# Altium PCB radxa_cm3_io_board_v1360_pcb_layout.PcbDoc (part 6 of 7)
Units mil, origin at the board's own origin, x right, y up, seen from the top; angles counter-clockwise.
Board outline 6299.61 x 3544.09 mil, 4 copper layers (Top, GND, Power, Bottom), stack 35.4 mil thick; 513 components, 397 nets, 1855 pads, 2695 vias.
Unrouted connection lines stored in the file: 280.
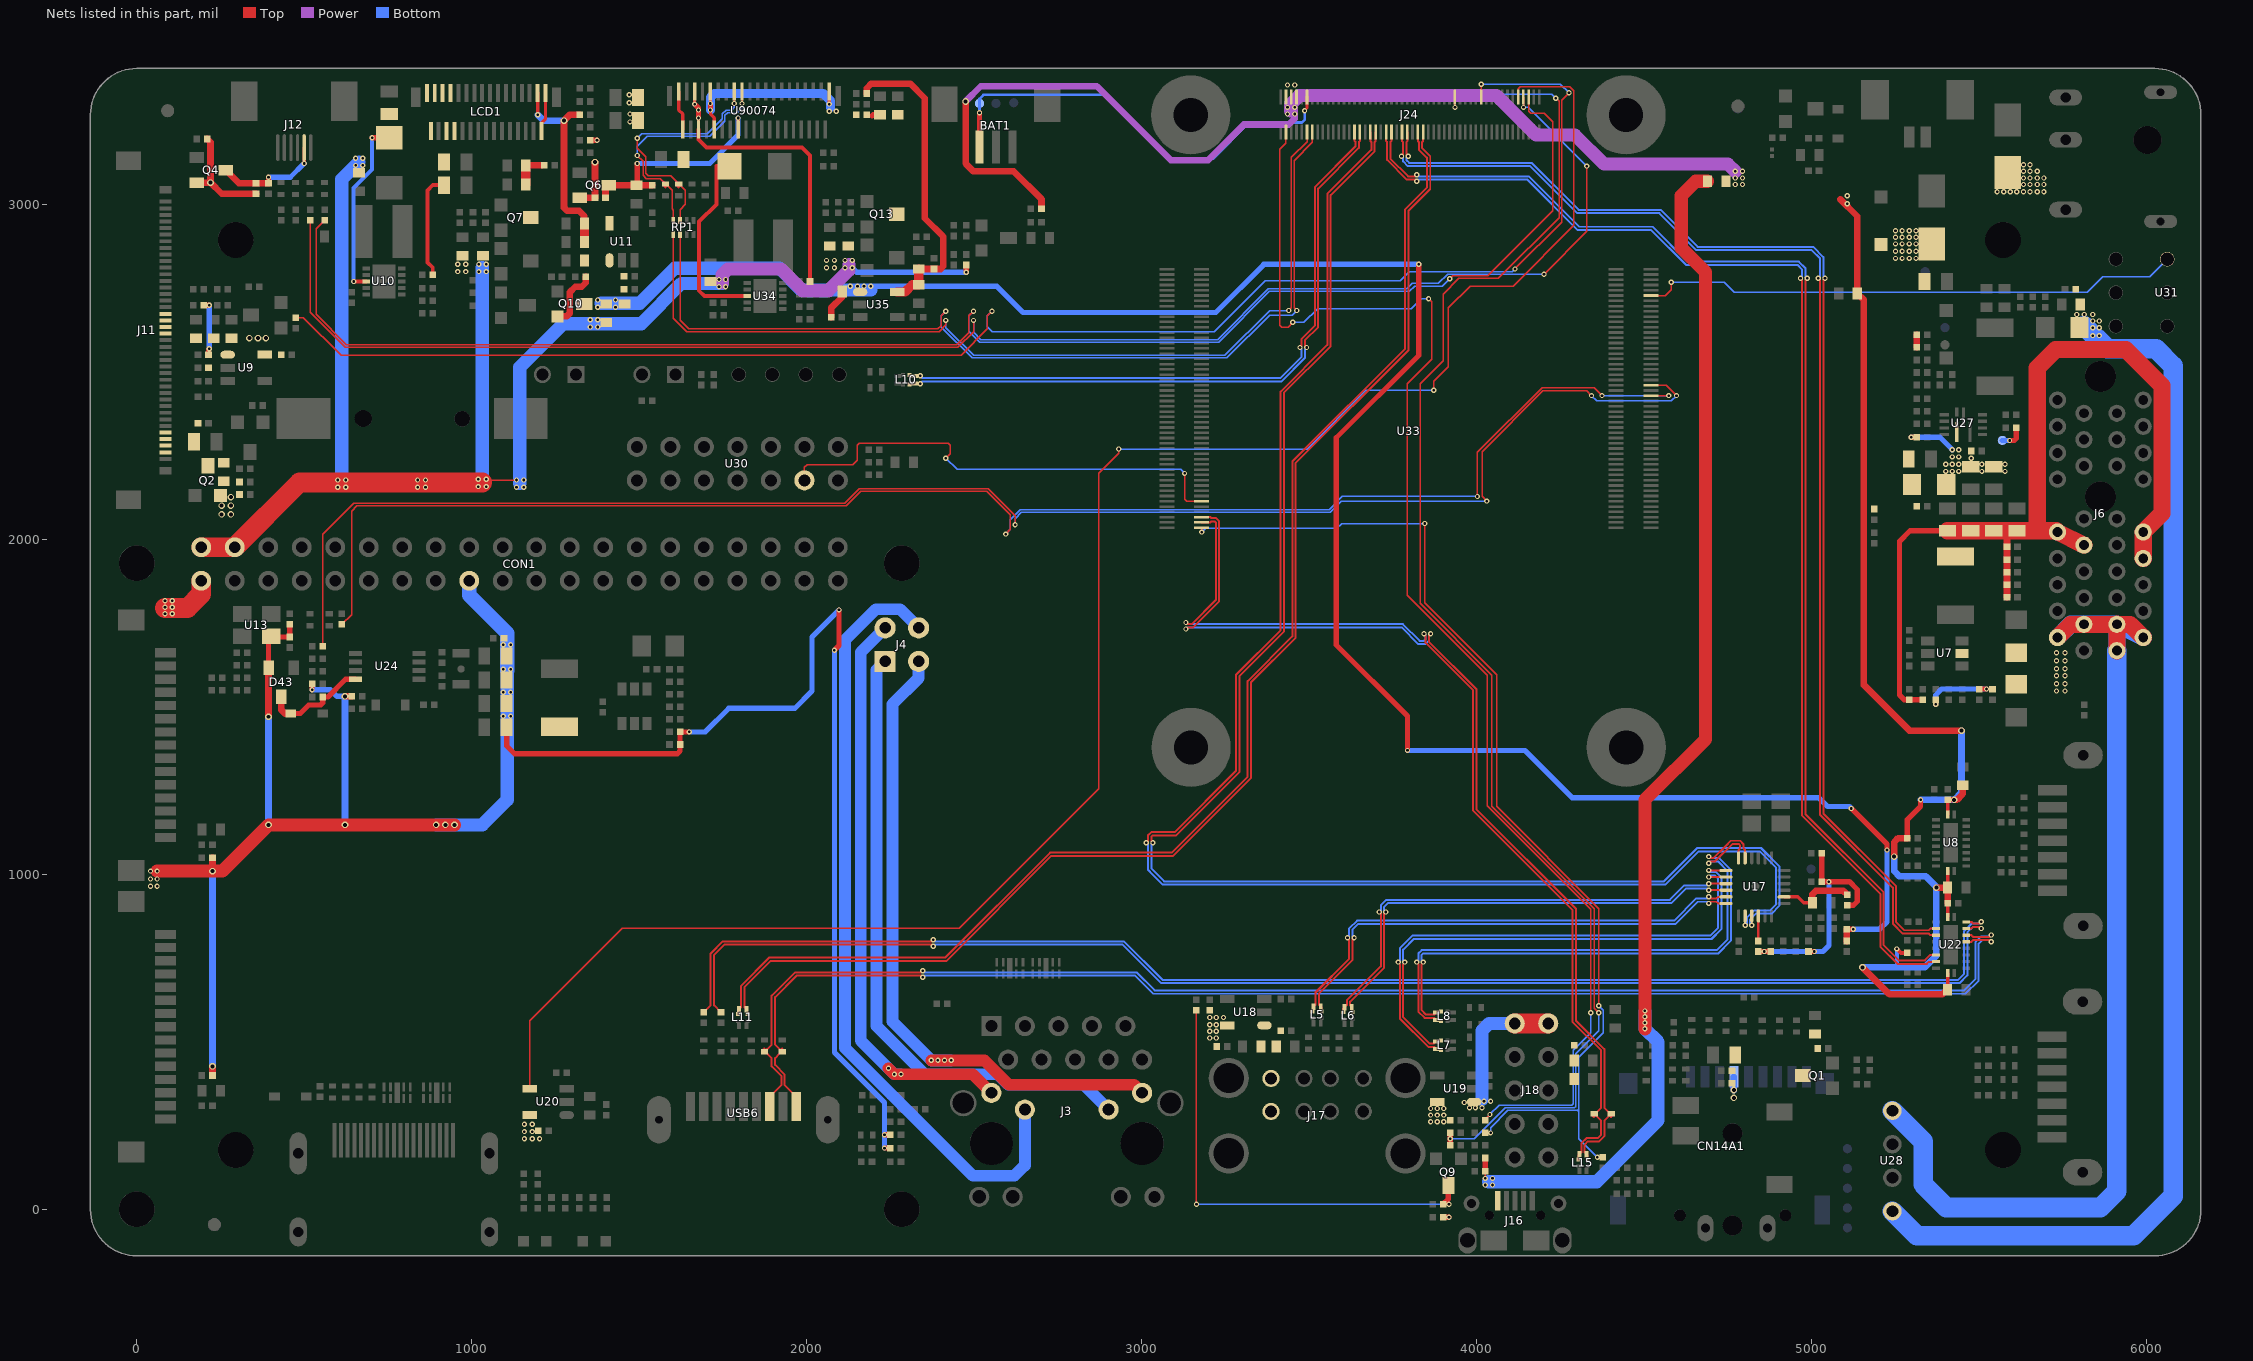
[diagram p8: the nets of this part, all layers, seen from the top]

## Via types
v1: diameter 15.75, hole 7.87, Top to Bottom, 2660 vias
v2: diameter 19.68, hole 11.81, Top to Bottom, 35 vias

## Nets (pads, with @x,y where several pads share a name; then routed paths per layer and width w, separated by ;. In a path a pad name is that pad's centre, name@x,y a point inside that pad or via, vN(x,y) a via of type N, cw(c..) or ccw(c..) an arc to the next point about the centre after c; other vN are vias at no path point) (continued)
TP_INT_1: J24.87 RP1.7 | length 2870.3
  Top w3.94: RP1.7@1621.89,2910.6 1621.89,2653.7 1647.64,2627.95 2391.79,2627.95 2401.57,2637.74 2401.57,2667.32 v1(2415.35,2681.1) ; v1(3462.6,2683.07) 3454.72,2690.94 3454.72,3130.51 3509.25,3185.04 J24.87@3509.25,3216.14
  Bottom w3.94: v1(2415.35,2681.1) 2401.57,2667.32 2401.57,2633.86 2494.09,2541.34 3253.94,2541.34 3381.89,2669.29 3448.82,2669.29 v1(3462.6,2683.07)
TP_INT_L: J24.8 R46.1 | length 4848.5
  Top w3.94: R46.1@517.72,2952.76 517.72,2677.17 622.05,2572.83 2450.9,2572.83 2498.03,2619.96 v1(2498.03,2653.54) ; J24.8@4139.17,3320.08 4139.76,3319.49 v1(4139.76,3289.37) ; v1(4200.79,2791.34) 4328.74,2919.29 v1(4328.74,3114.17)
  Bottom w3.94: v1(2498.03,2653.54) 2498.03,2617.94 2519.51,2596.46 3226.55,2596.46 3378.13,2748.03 3791.34,2748.03 3807.09,2763.78 3885.83,2763.78 3913.39,2791.34 v1(4200.79,2791.34) ; v1(4139.76,3289.37) 4153.54,3289.37 v1(4328.74,3114.17)
TP_INT_LCD: D15.1 RP1.2 U90074.25 | length 733.6
  Top w3.94: v1(1494.09,3196.85) 1494.09,3167.32 1519.69,3141.73 1519.69,3092.52 1527.56,3084.65 1594.49,3084.65 D15.1@1618.11,3061.02 1637.8,3041.34 1637.8,3000 1622.05,2984.25 1622.05,2951.76 RP1.2@1621.89,2951.6 ; v1(1783.46,3301.18) U90074.25@1783.46,3336.61
  Bottom w3.94: v1(1494.09,3196.85) 1507.87,3210.63 1702.76,3210.63 1748.03,3255.91 1748.03,3269.68 1759.84,3281.5 1775.59,3281.5 1783.46,3289.37 v1(1783.46,3301.18)
TP_PWR_DET: J24.24 R51.2 | length 4816.4
  Top w3.94: R51.2@474.41,2661.42 498.03,2661.42 610.24,2549.21 2460.69,2549.21 2539.37,2627.89 2539.37,2667.32 v1(2553.15,2681.1) ; J24.24@4013.19,3320.08 4013.19,3357.68 v1(4013.78,3358.27) ; v1(4114.17,2807.09) 4253.94,2946.85 4253.94,3311.02 v1(4275.59,3332.68)
  Bottom w3.94: v1(2553.15,2681.1) 2539.37,2667.32 2539.37,2635.15 2554.44,2620.08 3216.77,2620.08 3368.34,2771.65 3771.65,2771.65 3799.21,2799.21 4106.3,2799.21 v1(4114.17,2807.09) ; v1(4013.78,3358.27) 4250,3358.27 v1(4275.59,3332.68)
TP_RST_1: J24.89 RP1.8 | length 2792.8
  Top w3.94: RP1.8@1601.89,2910.6 1601.89,2659.92 1641.73,2620.08 2395.05,2620.08 2415.35,2640.38 v1(2415.35,2653.54) ; v1(3438.98,2683.07) 3446.85,2690.94 3446.85,3140.35 3493.5,3187.01 J24.89@3493.5,3216.14
  Bottom w3.94: v1(2415.35,2653.54) 2415.35,2631.89 2498.03,2549.21 3248.03,2549.21 3381.89,2683.07 v1(3438.98,2683.07)
TP_RST_L: J24.6 R45.1 | length 4739.7
  Top w3.94: R45.1@561.02,2952.76 535.43,2927.17 535.43,2671.26 625.98,2580.71 2447.64,2580.71 2484.25,2617.32 2484.25,2667.32 v1(2498.03,2681.1) ; v1(3919.29,2777.56) 3929.13,2787.4 4033.41,2787.4 4226.38,2980.37 4226.38,3246.74 4201.46,3271.65 4161.42,3271.65 4154.92,3278.15 J24.6@4154.92,3320.08
  Bottom w3.94: v1(2498.03,2681.1) 2484.25,2667.32 2484.25,2620.58 2516.25,2588.58 3229.81,2588.58 3381.39,2740.16 3799.21,2740.16 3814.96,2755.91 3897.64,2755.91 v1(3919.29,2777.56)
TP_RST_LCD: D16.1 RP1.1 U90074.23 | length 710.8
  Top w3.94: v1(1494.09,3145.67) 1511.81,3127.95 1511.81,3086.61 1521.65,3076.77 1562.99,3076.77 D16.1@1578.74,3061.02 1598.43,3041.34 1598.43,2986.22 1602.36,2982.28 1602.36,2952.07 RP1.1@1601.89,2951.6 ; v1(1807.09,3301.18) U90074.23@1807.09,3336.61
  Bottom w3.94: v1(1494.09,3145.67) 1494.09,3173.23 1523.62,3202.76 1710.63,3202.76 1755.91,3248.03 1755.91,3265.75 1763.78,3273.62 1793.31,3273.62 1807.09,3287.4 v1(1807.09,3301.18)
TR0: J3.11 J4.2 | length 1761.1
  Top w35.43: v1(2244.09,421.26) v1(2261.81,403.54) 2495.67,403.54 J3.11@2551.18,348.03
  Bottom w35.43: J4.2@2234.25,1735.83 2161.42,1662.99 2161.42,503.94 v1(2244.09,421.26) v1(2261.81,403.54) v1(2281.5,403.54)
TR1: J3.12 J4.1 | length 2372.5
  Bottom w35.43: J4.1@2334.25,1735.83 2278.74,1791.34 2206.69,1791.34 2114.17,1698.82 2114.17,482.28 2496.06,100.39 2620.08,100.39 2651.18,131.5 J3.12@2651.18,298.03
TR2: J3.13 J4.4 | length 1894.9
  Bottom w35.43: J4.4@2234.25,1635.83 2208.66,1610.24 2208.66,547.24 2352.36,403.54 2570.28,403.54 2601.77,372.05 2827.17,372.05 J3.13@2901.18,298.03
TR3: J3.14 J4.3 | length 1999.8
  Top w35.43: v1(2372.05,444.88) v1(2391.73,444.88) v1(2411.42,444.88) v1(2431.1,444.88) 2530.49,444.88 2603.33,372.05 2977.17,372.05 J3.14@3001.18,348.03
  Bottom w35.43: J4.3@2334.25,1635.83 2334.25,1586.22 2255.91,1507.87 2255.91,561.02 v1(2372.05,444.88) v1(2411.42,444.88) v1(2431.1,444.88)
TS: BAT1.3 J24.90 P2.1 | length 1317.4
  Top w7.87: v1(3486.22,3279.53) 3486.22,3280.12 3493.5,3287.4 J24.90@3493.5,3320.08
  Top w15.75: BAT1.3@2515.75,3171.26 v1(2515.75,3273.62)
  Bottom w7.87: v1(2515.75,3273.62) P2.1@2515.75,3301.18 2515.75,3314.96 2527.56,3326.77 2891.73,3326.77 3082.68,3135.83 3212.6,3135.83 3320.87,3244.09 3478.35,3244.09 3486.22,3251.97 v1(3486.22,3279.53)
TV_OUT: U30.11 U33.111 | length 1439.9
  Top w3.94: U30.11@1993.31,2175.98 1993.31,2214.57 2001.18,2222.44 2137.8,2222.44 2151.57,2236.22 2151.57,2281.5 2157.48,2287.4 2421.94,2287.4 2429.13,2280.2 2429.13,2255.91 v1(2415.35,2242.13) ; v1(3127.95,2196.85) 3127.95,2120.08 3134.45,2113.58 U33.111@3179.13,2113.58
  Bottom w3.94: v1(2415.35,2242.13) 2448.82,2208.66 3116.14,2208.66 v1(3127.95,2196.85)
UART2_RX: R168.2 U33.51 | length 4750.7
  Top w3.94: R168.2@612.2,1746.06 641.73,1775.59 641.73,2084.65 657.48,2100.39 2117.38,2100.39 2160.68,2143.7 2538.14,2143.7 2608.27,2073.57 2608.27,2029.53 v1(2594.49,2015.75) ; v1(4001.97,2127.95) 4001.97,2259.84 4194.88,2452.76 4350.39,2452.76 v1(4374.02,2429.13) ; U33.51@4520.47,2428.54 4521.06,2429.13 v1(4572.83,2429.13)
  Bottom w3.94: v1(2594.49,2015.75) 2608.27,2029.53 2608.27,2059.11 2637.74,2088.58 3559.17,2088.58 3598.54,2127.95 v1(4001.97,2127.95) ; v1(4374.02,2429.13) v1(4572.83,2429.13)
UART2_TX: R167.2 U33.55 | length 4883.1
  Top w3.94: R167.2@555.12,1681.1 555.12,2015.75 647.64,2108.27 2114.12,2108.27 2157.42,2151.57 2541.4,2151.57 2622.05,2070.92 v1(2622.05,2043.31) ; v1(4029.53,2114.17) 4015.75,2127.95 4015.75,2261.81 4196.85,2442.91 4328.74,2442.91 v1(4342.52,2429.13) ; U33.55@4520.47,2460.04 4565.55,2460.04 v1(4596.46,2429.13)
  Bottom w3.94: v1(2622.05,2043.31) 2622.05,2061.76 2641,2080.71 3562.43,2080.71 3595.9,2114.17 v1(4029.53,2114.17) ; v1(4342.52,2429.13) 4358.27,2413.39 4580.71,2413.39 v1(4596.46,2429.13)
USB1_DM: L5.4 R111.1 U17.11 | length 1466.5
  Top w3.94: R111.1@3509.84,590.55 3509.84,604.33 3510.83,605.32 L5.4@3512.79,605.32
  Top w5.91: L5.4@3512.79,605.32 3518.7,611.23 3518.7,647.42 3619.09,747.82 3619.09,806.1 v1(3614.17,811.02) ; v1(4692.91,933.07) 4698.82,928.15 4715.55,928.15 4720.47,933.07 U17.11@4744.09,933.07
  Bottom w5.91: v1(3614.17,811.02) 3619.09,815.94 3619.09,838.58 3642.72,862.2 4589.5,862.2 4655.44,928.15 4687.99,928.15 v1(4692.91,933.07)
USB1_DP: L5.2 R109.1 U17.12 | length 1450.2
  Top w3.94: L5.2@3534.45,605.32 3536.41,605.32 3537.4,604.33 R109.1@3537.4,590.55
  Top w5.91: L5.2@3534.45,605.32 3528.54,611.23 3528.54,643.35 3628.94,743.74 3628.94,806.1 v1(3633.86,811.02) ; v1(4692.91,913.39) 4698.82,918.31 4715.55,918.31 4720.47,913.39 U17.12@4744.09,913.39
  Bottom w5.91: v1(3633.86,811.02) 3628.94,815.94 3628.94,834.51 3646.79,852.36 4593.57,852.36 4659.52,918.31 4687.99,918.31 v1(4692.91,913.39)
USB2.0_HUB_PWR: J24.34 R107.2 R108.1 | length 4327.8
  Top w3.94: J24.34@3934.45,3320.08 3934.45,3288.78 v1(3935.04,3289.37) ; v1(4236.22,3316.93) 4246.06,3307.09 4246.06,2960.63 4064.96,2779.53 3946.85,2779.53 3899.61,2732.28 3899.61,2533.46 3830.71,2464.57 3830.71,1809.06 4045.28,1594.49 4045.28,1202.76 4350.39,897.64 4350.39,600.39 v1(4364.17,586.61)
  Top w15.75: R107.2@3921.26,190.94 v1(3921.26,210.63) R108.1@3921.26,228.35
  Bottom w3.94: v1(3921.26,210.63) 3992.13,210.63 4084.65,303.15 4291.34,303.15 4295.28,307.09 4295.28,464.57 4364.17,533.46 v1(4364.17,586.61) ; v1(3935.04,3289.37) 3935.04,3318.9 3944.88,3328.74 4224.41,3328.74 v1(4236.22,3316.93)
USB2_DM: L6.4 R112.1 U17.9 | length 1427.3
  Top w3.94: R112.1@3600.39,588.58 3600.39,598.43 L6.4@3605.31,603.35
  Top w5.91: L6.4@3605.31,603.35 3612.2,610.24 3612.2,624.02 3713.58,725.39 3713.58,882.87 v1(3708.66,887.8) ; v1(4692.91,972.44) U17.9@4744.09,972.44
  Bottom w5.91: v1(3708.66,887.8) 3713.58,892.72 3713.58,907.48 3730.31,924.21 4576.7,924.21 4620.01,967.52 4687.99,967.52 v1(4692.91,972.44)
USB2_DP: L6.2 R110.1 U17.10 | length 1411.9
  Top w3.94: L6.2@3626.97,603.35 3626.97,590.55 3629.92,590.55 R110.1@3631.89,588.58
  Top w5.91: L6.2@3626.97,603.35 3622.05,608.27 3622.05,619.94 3723.43,721.32 3723.43,882.87 v1(3728.35,887.8) ; v1(4692.91,952.76) U17.10@4744.09,952.76
  Bottom w5.91: v1(3728.35,887.8) 3723.43,892.72 3723.43,903.4 3734.39,914.37 4580.78,914.37 4624.09,957.68 4687.99,957.68 v1(4692.91,952.76)
USB2_HOST2_DM: J24.65 U17.14 | length 4744.4
  Top w5.91: v1(3013.78,1094.49) 3018.7,1099.41 3018.7,1116.14 3028.54,1125.98 3098.43,1125.98 3281.5,1309.06 3281.5,1595.47 3414.37,1728.35 3414.37,2441.01 3554.13,2580.78 3554.13,3031.57 3685.43,3162.87 3685.43,3186.02 3682.48,3188.98 J24.65@3682.48,3216.14 ; v1(4801.18,848.43) U17.14@4801.18,875.98
  Bottom w5.91: v1(3013.78,1094.49) 3018.7,1089.57 3018.7,1013.71 3031.43,1000.98 3062.92,969.49 4563.06,969.49 4662.47,1068.9 4844.35,1068.9 4893.7,1019.55 4893.7,910.57 4875.84,892.72 4828.74,892.72 4806.1,870.08 4806.1,853.35 v1(4801.18,848.43)
USB2_HOST2_DP: J24.63 U17.15 | length 4744.4
  Top w5.91: v1(3033.46,1094.49) 3028.54,1099.41 3028.54,1112.06 3032.62,1116.14 3102.5,1116.14 3291.34,1304.98 3291.34,1591.4 3424.21,1724.27 3424.21,2436.94 3563.98,2576.7 3563.98,3027.49 3695.28,3158.79 3695.28,3186.02 3698.23,3188.98 J24.63@3698.23,3216.14 ; v1(4820.87,848.43) U17.15@4820.87,875.98
  Bottom w5.91: v1(3033.46,1094.49) 3028.54,1089.57 3028.54,1017.79 3067,979.33 4558.99,979.33 4658.39,1078.74 4848.43,1078.74 4903.54,1023.62 4903.54,906.5 4879.92,882.87 4832.82,882.87 4815.94,866 4815.94,853.35 v1(4820.87,848.43)
USB2_HOST3_DM: J24.71 L10.4 R126.1 | length 1945.1
  Top w5.91: R126.1@2307.09,2490.16 2320.87,2490.16 2321.85,2489.17 L10.4@2321.85,2487.21 2322.84,2488.19 v1(2338.58,2488.19) ; v1(3472.44,2572.83) 3477.36,2577.76 3477.36,2598.43 3516.73,2637.8 3516.73,3051.25 3638.19,3172.71 3638.19,3186.02 3635.24,3188.98 J24.71@3635.24,3216.14
  Bottom w5.91: v1(2338.58,2488.19) 2345.47,2481.3 3413.25,2481.3 3477.36,2545.42 3477.36,2567.91 v1(3472.44,2572.83)
USB2_HOST3_DP: J24.69 L10.2 R124.1 | length 1960.3
  Top w5.91: R124.1@2307.09,2462.6 2310.04,2465.55 L10.2@2321.85,2465.55 2337.6,2465.55 v1(2338.58,2464.57) ; v1(3492.13,2572.83) 3487.2,2577.76 3487.2,2594.35 3526.57,2633.72 3526.57,3047.17 3648.03,3168.63 3648.03,3186.02 3650.98,3188.98 J24.69@3650.98,3216.14
  Bottom w5.91: v1(2338.58,2464.57) 2345.47,2471.46 3417.32,2471.46 3487.2,2541.34 3487.2,2567.91 v1(3492.13,2572.83)
USB3_DM: L7.2 R116.1 U17.7 | length 1582.7
  Top w3.94: L7.2@3877.95,501.97 L7.2@3878.93,500.99 3881.88,503.94 R116.1@3893.7,503.94
  Top w5.91: v1(3785.43,738.19) 3780.51,733.27 3780.51,573.96 3859.39,495.08 3871.06,495.08 L7.2@3877.95,501.97 ; v1(4692.91,1011.81) U17.7@4744.09,1011.81
  Bottom w5.91: v1(3785.43,738.19) 3780.51,743.11 3780.51,775.45 3812.15,807.09 4700.79,807.09 4730.31,836.61 4730.31,991.14 4714.57,1006.89 4697.83,1006.89 v1(4692.91,1011.81)
USB3_DP: L7.4 R121.1 U17.8 | length 1582.5
  Top w3.94: L7.4@3878.93,479.33 3891.73,479.33 3893.7,477.36 R121.1@3893.7,476.38
  Top w5.91: v1(3765.75,738.19) 3770.67,733.27 3770.67,569.88 3855.31,485.24 3873.02,485.24 L7.4@3878.93,479.33 ; v1(4692.91,992.13) U17.8@4744.09,992.13
  Bottom w5.91: v1(3765.75,738.19) 3770.67,743.11 3770.67,779.53 3808.07,816.93 4696.71,816.93 4720.47,840.69 4720.47,987.06 4710.49,997.05 4697.83,997.05 v1(4692.91,992.13)
USB3_HOST1_DM: J24.47 L11.1 R128.2 | length 4016.4
  Top w3.94: R128.2@1795.28,582.68 1795.28,594.5 L11.1@1798.23,597.44
  Top w5.91: L11.1@1798.23,597.44 1804.13,603.35 1804.13,667.32 1888.78,751.97 2413.39,751.97 2726.38,1064.96 3089.43,1064.96 3315.94,1291.48 3315.94,1576.77 3449.8,1710.63 3449.8,2232.42 3786.42,2569.04 3786.42,2984.94 3851.38,3049.9 3851.38,3139.17 3827.17,3163.39 3827.17,3186.02 3824.21,3188.98 J24.47@3824.21,3216.14
USB3_HOST1_DP: J24.45 L11.3 R129.2 | length 4016.4
  Top w3.94: L11.3@1819.89,597.44 1822.83,594.5 R129.2@1822.83,582.68
  Top w5.91: L11.3@1819.89,597.44 1813.98,603.35 1813.98,663.25 1892.86,742.13 2417.46,742.13 2730.45,1055.12 3093.5,1055.12 3325.79,1287.4 3325.79,1572.69 3459.65,1706.55 3459.65,2228.35 3796.26,2564.96 3796.26,2980.86 3861.22,3045.82 3861.22,3143.25 3837.01,3167.46 3837.01,3186.02 3839.96,3188.98 J24.45@3839.96,3216.14
USB3_HOST1_SSRXN: J24.59 U22.7 | length 3775
  Top w5.91: J24.59@3729.72,3216.14 3729.72,3188.98 3732.68,3186.02 3732.68,3132.41 3791.27,3073.82 3815.94,3073.82 v1(3820.87,3068.9) ; v1(4966.54,2779.53) 4971.46,2774.61 4971.46,1175.2 5204.72,941.93 5204.72,784.45 5256.73,732.44 5342.52,732.44 5348.27,738.19 5368.9,738.19 U22.7@5370.47,739.76
  Bottom w5.91: v1(3820.87,3068.9) 3825.79,3073.82 4151.57,3073.82 4302.17,2923.23 4520.67,2923.23 4625,2818.9 4957.54,2818.9 4971.46,2804.98 4971.46,2784.45 v1(4966.54,2779.53)
USB3_HOST1_SSRXP: J24.57 U22.6 | length 3762.1
  Top w5.91: J24.57@3745.47,3216.14 3745.47,3188.98 3742.52,3186.02 3742.52,3136.49 3795.35,3083.66 3815.94,3083.66 v1(3820.87,3088.58) ; v1(4986.22,2779.53) 4981.3,2774.61 4981.3,1179.27 5214.57,946.01 5214.57,788.53 5260.05,743.05 5337.93,743.05 5354.33,759.45 U22.6@5370.47,759.45
  Bottom w5.91: v1(3820.87,3088.58) 3825.79,3083.66 4155.65,3083.66 4306.24,2933.07 4524.75,2933.07 4629.08,2828.74 4961.61,2828.74 4981.3,2809.06 4981.3,2784.45 v1(4986.22,2779.53)
USB3_HOST1_SSTXN: J24.53 U22.3 | length 3679.6
  Top w5.91: v1(3775.59,3143.7) 3780.22,3148.33 3780.22,3185.73 3776.97,3188.98 J24.53@3776.97,3216.14 ; v1(5019.69,2779.53) 5024.61,2774.61 5024.61,1177.71 5242.13,960.19 5242.13,853.35 5272.05,823.43 5349.41,823.43 5354.33,818.5 U22.3@5370.47,818.5
  Bottom w5.91: v1(3775.59,3143.7) 3780.51,3138.78 3780.51,3127.95 3794.29,3114.17 4159.45,3114.17 4300.2,2973.43 4545.21,2973.43 4655.44,2863.19 4999.93,2863.19 5024.61,2838.51 5024.61,2784.45 v1(5019.69,2779.53)
USB3_HOST1_SSTXP: J24.51 U22.2 | length 3663.3
  Top w5.91: J24.51@3792.72,3216.14 3792.72,3188.39 3790.06,3185.73 3790.06,3148.92 v1(3795.28,3143.7) ; v1(5039.37,2779.53) 5034.45,2774.61 5034.45,1181.79 5251.97,964.27 5251.97,857.42 5276.12,833.27 5349.41,833.27 5354.33,838.19 U22.2@5370.47,838.19
  Bottom w5.91: v1(3795.28,3143.7) 3790.35,3138.78 3790.35,3132.03 3798.37,3124.02 4163.53,3124.02 4304.27,2983.27 4549.28,2983.27 4659.52,2873.03 5004.01,2873.03 5034.45,2842.59 5034.45,2784.45 v1(5039.37,2779.53)
USB3_SSRXN: D35.2 U22.15 USB6.5 | length 4266.1
  Top w5.91: USB6.5@1968.5,307.09 1968.5,336.61 1934.06,371.06 1934.06,402.56 1905.51,431.1 1905.51,451.77 1918.43,464.69 D35.2@1927.17,470.47 1905.51,492.13 1905.51,633.72 1969.63,697.83 2341.54,697.83 v1(2346.46,692.91) ; U22.15@5461.02,798.82 5476.38,798.82 5481.3,803.74 5530.91,803.74 v1(5535.43,799.21)
  Bottom w5.91: v1(2346.46,692.91) 2351.38,697.83 2980.31,697.83 3034.45,643.7 5458.66,643.7 5498.03,683.07 5498.03,793.31 5508.86,804.13 5530.51,804.13 v1(5535.43,799.21)
USB3_SSRXP: D34.2 U22.16 USB6.6 | length 4282.7
  Top w5.91: USB6.6@1889.76,307.09 1889.76,336.61 1924.21,371.06 1924.21,398.48 1895.67,427.03 1895.67,451.77 1882.75,464.69 D34.2@1874.02,470.47 1895.67,492.13 1895.67,637.8 1965.55,707.68 2341.54,707.68 v1(2346.46,712.6) ; U22.16@5461.02,818.5 5476.38,818.5 5481.3,813.58 5530.12,813.58 v1(5535.43,818.9)
  Bottom w5.91: v1(2346.46,712.6) 2351.38,707.68 2984.39,707.68 3038.53,653.54 5454.58,653.54 5488.19,687.15 5488.19,797.38 5504.78,813.98 5530.51,813.98 v1(5535.43,818.9)
USB3_SSTXN: C106.1 U22.17 | length 4222.2
  Top w5.91: C106.1@1744.09,588.58 1723.43,609.25 1723.43,759.7 1754.08,790.35 2373.03,790.35 v1(2377.95,785.43) ; U22.17@5461.02,838.19 5476.38,838.19 5481.5,843.31 5501.18,843.31 v1(5505.91,838.58)
  Bottom w5.91: v1(2377.95,785.43) 2382.87,790.35 2942.77,790.35 3057.93,675.2 5440.94,675.2 5464.57,698.82 5464.57,826.63 5481.44,843.5 5500.98,843.5 v1(5505.91,838.58)
USB3_SSTXP: C107.1 U22.18 | length 4238.5
  Top w5.91: C107.1@1692.91,588.58 1713.58,609.25 1713.58,763.78 1750,800.2 2373.03,800.2 v1(2377.95,805.12) ; U22.18@5461.02,857.87 5476.77,857.87 5481.5,853.15 5500.79,853.15 v1(5505.91,858.27)
  Bottom w5.91: v1(2377.95,805.12) 2382.87,800.2 2946.85,800.2 3062.01,685.04 5436.87,685.04 5454.72,702.9 5454.72,830.71 5477.36,853.35 5500.98,853.35 v1(5505.91,858.27)
USB4_DM: L8.2 R117.1 U17.5 | length 1645.4
  Top w3.94: L8.2@3878.93,587.6 3881.88,590.55 R117.1@3893.7,590.55
  Top w5.91: v1(3840.55,738.19) 3835.63,733.27 3835.63,594.63 3848.57,581.69 3873.02,581.69 L8.2@3878.93,587.6 ; v1(4692.91,1053.15) 4697.83,1048.23 4706.62,1048.23 4743.11,1084.72 4758.79,1100.39 4786.42,1100.39 4796.26,1090.55 4796.26,1077.76 4801.18,1072.83 U17.5@4801.18,1049.21
  Bottom w5.91: v1(3840.55,738.19) 3835.63,743.11 3835.63,759.7 3839.71,763.78 4720.47,763.78 4758.86,802.17 4758.86,1013.78 4724.41,1048.23 4697.83,1048.23 v1(4692.91,1053.15)
USB4_DP: L8.4 R122.1 U17.6 | length 1629.1
  Top w3.94: L8.4@3878.93,565.94 3890.75,565.94 R122.1@3893.7,562.99
  Top w5.91: v1(3820.87,738.19) 3825.79,733.27 3825.79,590.55 3844.49,571.85 3873.02,571.85 L8.4@3878.93,565.94 ; v1(4692.91,1033.46) 4697.83,1038.39 4710.7,1038.39 4762.87,1090.55 4782.34,1090.55 4786.42,1086.47 4786.42,1077.76 4781.5,1072.83 U17.6@4781.5,1049.21
  Bottom w5.91: v1(3820.87,738.19) 3825.79,743.11 3825.79,763.78 3835.63,773.62 4716.4,773.62 4749.02,806.24 4749.02,1009.7 4720.33,1038.39 4697.83,1038.39 v1(4692.91,1033.46)
USB_5V_IN: J24.94 J24.96 J24.98 R185.2 R222.2 | length 3127.7
  Top w3.94: J24.98@3430.51,3320.08 J24.98@3431.1,3319.49
  Top w19.68: v2(2474.41,3307.09) 2474.41,3122.05 2498.03,3098.43 2618.11,3098.43 2700.79,3015.75 R222.2@2700.79,2986.22
  Power w3.94: v1(3435.04,3269.68) 3444.88,3279.53
  Power w19.68: v2(2474.41,3307.09) 2519.69,3352.36 2866.14,3352.36 3086.61,3131.89 3198.82,3131.89 3305.12,3238.19 3438.98,3238.19 3456.69,3255.91 v1(3456.69,3269.68) v1(3456.69,3289.37)
  Power w39.37: 3444.88,3279.53 3444.88,3299.21 3470.47,3324.8 4059.06,3324.8 4177.17,3206.69 4293.31,3206.69 4379.92,3120.08 4750,3120.08 v1(4771.65,3098.43)
  other v1: 4771.65,3059.06 4793.31,3059.06 4771.65,3078.74 4793.31,3078.74 4793.31,3098.43 3435.04,3289.37 3435.04,3356.3 3456.69,3356.3
USB_OTG0_DM: D19.2 L15.1 R92.2 U33.103 | length 3011.5
  Top w3.94: R92.2@4303.15,149.61 4303.15,161.42 4305.12,163.39 L15.1@4306.1,164.37
  Top w5.91: v1(3131.89,1751.97) 3136.81,1747.05 3149.54,1747.05 3221.46,1818.97 3221.46,2049.61 3217.52,2053.54 3207.68,2053.54 3204.72,2050.59 U33.103@3179.13,2050.59 ; v1(3842.52,1718.5) 3847.44,1713.58 3847.44,1690.94 3989.17,1549.21 3989.17,1190.59 4286.42,893.35 4286.42,559.06 4371.06,474.41 4371.06,303.15 4359.13,291.22 D19.2@4350.39,285.43 4371.06,264.76 4371.06,222.58 4361.08,212.6 4327.62,212.6 4312.01,196.99 4312.01,170.28 L15.1@4305.12,163.39
  Bottom w5.91: v1(3131.89,1751.97) 3136.81,1747.05 3779.67,1747.05 3829.86,1696.85 3842.38,1696.85 3847.44,1701.91 3847.44,1713.58 v1(3842.52,1718.5)
USB_OTG0_DP: D18.2 L15.3 R93.2 U33.105 | length 3059.6
  Top w3.94: L15.3@4327.76,164.37 4327.96,164.16 4330.71,161.42 R93.2@4330.71,149.61
  Top w5.91: v1(3131.89,1732.28) 3136.81,1737.2 3153.61,1737.2 3231.3,1814.89 3231.3,2054.13 3222.05,2063.39 3207.68,2063.39 3204.72,2066.34 U33.105@3179.13,2066.34 ; v1(3862.2,1718.5) 3857.28,1713.58 3857.28,1695.02 3999.02,1553.29 3999.02,1194.67 4296.26,897.42 4296.26,563.13 4380.91,478.49 4380.91,303.15 4392.84,291.22 D18.2@4401.57,285.43 4380.91,264.76 4380.91,218.5 4365.16,202.76 4331.69,202.76 4321.85,192.91 4321.85,170.28 L15.3@4327.96,164.16
  Bottom w5.91: v1(3131.89,1732.28) 3136.81,1737.2 3775.59,1737.2 3825.79,1687.01 3846.46,1687.01 3857.28,1697.83 3857.28,1713.58 v1(3862.2,1718.5)
USB_OTG0_ID: R95.2 R99.2 U33.101 | length 3198.2
  Top w3.94: v1(3179.13,2021.65) U33.101@3179.13,2034.84 ; v1(3844.49,2047.24) 3844.49,1811.02 4059.06,1596.46 4059.06,1202.76 4364.17,897.64 v1(4364.17,608.27) ; R99.2@4025.59,228.35 v1(4041.34,228.35) ; v1(4360.24,155.51) R95.2@4375.98,155.51
  Bottom w3.94: v1(3179.13,2021.65) 3190.94,2033.46 3582.68,2033.46 3596.46,2047.24 v1(3844.49,2047.24) ; v1(4041.34,228.35) 4041.34,244.09 4092.52,295.28 4301.18,295.28 ; v1(4360.24,155.51) 4305.12,210.63 4305.12,291.34 ; v1(4364.17,608.27) 4377.95,594.49 4377.95,527.56 4305.12,454.72 4305.12,299.21 ; 4301.18,295.28 4305.12,291.34 ; 4301.18,295.28 4305.12,295.28 ; 4301.18,295.28 4305.12,299.21 ; 4305.12,291.34 4305.12,295.28 ; 4305.12,295.28 4305.12,299.21
USB_OTG0_VBUSDET: J24.97 R98.2 | length 4037.7
  Top w3.94: J24.97@3430.51,3216.14 3430.51,3183.07 3411.42,3163.98 3411.42,2639.76 3417.32,2633.86 3437.01,2633.86 v1(3450.79,2647.64) ; v1(3856.3,2718.5) 3866.14,2708.66 3866.14,2537.4 3793.31,2464.57 3793.31,1832.68 4031.5,1594.49 4031.5,1204.72 4340.55,895.67 v1(4340.55,586.61) ; R98.2@4025.59,265.75 4025.59,268.87 4039.37,282.65 v1(4039.37,283.46)
  Bottom w3.94: v1(3450.79,2647.64) 3484.25,2647.64 3525.59,2688.98 3805.12,2688.98 3834.65,2718.5 v1(3856.3,2718.5) ; v1(4039.37,283.46) 4066.93,311.02 4283.46,311.02 4287.4,314.96 4287.4,474.41 4340.55,527.56 v1(4340.55,586.61)
USB_PWR_EN: Q9.3 R114.2 R120.2 | length 1412.4
  Top w3.94: v1(3163.39,15.75) R114.2@3163.39,594.49 ; R120.2@3899.61,15.75 v1(3917.32,15.75)
  Top w15.75: R120.2@3899.61,15.75 3915.35,31.5 Q9.3@3915.35,71.2
  Bottom w3.94: v1(3163.39,15.75) v1(3917.32,15.75)
USB_PWR_H: J24.10 U20.4 | length 5579.5
  Top w3.94: U20.4@1173.23,360.24 1173.23,562.79 1449.02,838.58 2454.72,838.58 2872.05,1255.91 2872.05,2197.74 2931.1,2256.79 v1(2931.1,2269.68) ; v1(3872.05,2444.88) 3872.05,2472.44 3915.35,2515.75 3915.35,2690.94 3980.31,2755.91 4108.33,2755.91 4289.37,2936.95 4289.37,3338.58 4277.56,3350.39 4129.33,3350.39 4123.43,3344.49 J24.10@4123.43,3320.08
  Bottom w3.94: v1(2931.1,2269.68) 3493.95,2269.68 3669.15,2444.88 v1(3872.05,2444.88)
VBUS: C86.1 J16.1 R100.2 R185.1 | length 3687.8
  Top w3.94: v1(4025.59,92.52) C86.1@4025.59,114.17 ; R100.2@4025.59,152.6 R100.2@4025.59,153.54
  Top w15.75: C86.1@4025.59,114.17 R100.2@4025.59,152.6
  Top w39.37: v1(4501.97,539.37) v1(4501.97,592.52) 4501.97,1222.44 4683.07,1403.54 4683.07,2797.24 4610.24,2870.08 4610.24,3025.59 4653.54,3068.9 R185.1@4688.98,3068.9
  Bottom w3.94: v1(4025.59,72.83) 4035.43,82.68
  Bottom w39.37: 4035.43,82.68 4358.27,82.68 4541.34,265.75 4541.34,500 v1(4501.97,539.37) v1(4501.97,592.52)
  other v1: 4047.24,72.83 4047.24,92.52 4501.97,557.09 4501.97,574.8
VCC3V3_LCD0: C40.1 C41.1 C42.1 C46.1 C47.1 J11.18 J11.19 J11.20 J11.21 R40.2 U9.1 | length 164.2
  Top w15.75: R40.2@200.79,2698.82 v1(216.54,2698.82) ; C42.1@214.57,2551.18 214.57,2566.93 v1(216.54,2568.9)
  Bottom w15.75: v1(216.54,2568.9) v1(216.54,2698.82)
VCC3V3_PCIE: C12.1 C13.1 C14.1 C20.1 C21.1 C22.1 J6.A9 J6.A10 J6.B8 J6.B10 L1.2 R15.1 R21.2 R22.2 R23.2 R24.1 | length 3008.9
  Top w15.75: R15.1@5330.71,1521.65 C12.1@5291.34,1521.65 5275.59,1521.65 5261.81,1535.43 5261.81,1954.72 5261.81,1994.09 5293.31,2025.59 C20.1@5405.51,2025.59
  Top w19.68: R21.2@5582.68,1826.77 R22.2@5582.68,1864.17 R24.1@5582.68,1901.57 R23.2@5582.68,1938.98 C14.1@5582.68,1978.35 5582.68,2025.59
  Top w51.18: 5582.68,2025.59 C20.1@5405.51,2025.59 C22.1@5612.2,2025.59 ; J6.A9@5812.2,1982.68 J6.A10@5733.46,2022.05 5729.92,2025.59 C22.1@5612.2,2025.59 ; J6.B8@5989.37,1943.31 J6.B10@5989.37,2022.05 6045.28,2077.95 6045.28,2458.66 5937.01,2566.93 5728.35,2566.93 5673.23,2511.81 5673.23,2025.59 C22.1@5612.2,2025.59
VCC3V3_SD_1: C4.1 C5.1 C7.1 C8.1 CN14A1.4 Q1.3 R220.2 | length 39.6
  Bottom w19.68: v2(4767.72,356.3) CN14A1.4@4767.72,395.89
  other v2: 4767.72,332.68
VCC3V3_SYS: C29.1 C30.1 C45.1 C70.1 C109.1 C111.1 C148.1 C149.1 C150.1 C154.1 C155.1 C156.1 CON1.1 CON1.17 D43.2 FB6.1 FB7.1 L13.2 Q4.2 Q6.2 R4.2 R10.2 R44.1 R47.2 R61.1 R62.1 R63.2 R85.2 R138.2 R139.1 R157.1 R169.2 R197.1 R207.1 R209.1 R9212.2 U8.9 U8.20 U9.5 U13.4 U22.9 U22.20 | length 11346.1
  Top w3.94: v1@84.65,1795.28 v1(84.65,1797.24)
  Top w9.84: C109.1@5405.51,655.51 U22.9@5405.51,705.51 ; U22.20@5405.51,873.23 C111.1@5405.51,913.39 ; C29.1@5405.51,960.63 U8.9@5405.51,1010.63 ; U8.20@5405.51,1178.35 C30.1@5405.51,1222.44
  Top w11.81: v1(5253.94,777.56) 5265.75,765.75 R209.1@5285.43,765.75
  Top w15.75: D43.2@393.7,1616.14 393.7,1702.76 U13.4@401.58,1710.63 401.57,1720.47 413.39,1708.66 C70.1@456.69,1708.66 R85.2@456.69,1746.06 ; v1(523.62,1551.18) R138.2@523.62,1568.9 ; C155.1@1104.33,1438.98 1104.33,1383.86 1127.95,1360.24 1614.17,1360.24 1622.05,1368.11 R157.1@1622.05,1387.8 C148.1@1622.05,1425.2 v1(1649.61,1425.2) ; R63.2@1354.33,3190.94 v1(1374.02,3190.94) ; v1(2082.68,1669.29) 2096.46,1683.07 v1(2096.46,1789.37) ; v1(2232.28,183.07) R4.2@2250,183.07 ; v1(2232.28,222.44) R10.2@2250,222.44 ; R207.1@5285.43,1108.27 5285.43,1163.39 5324.8,1202.76 v1(5324.8,1222.44) ; C30.1@5405.51,1222.44 v2(5425.2,1222.44)
  Top w19.68: Q4.2@179.13,3064.96 v2(220.47,3064.96) ; R47.2@210.63,3194.88 220.47,3185.04 v2(220.47,3064.96) ; FB7.1@226.38,399.61 v2(226.38,427.17) ; v2(226.38,1009.84) FB6.1@226.38,1049.21 ; R44.1@356.3,3031.5 253.94,3031.5 v2(220.47,3064.96) ; v2(393.7,1470.47) D43.2@393.7,1616.14 ; v2(622.05,1531.5) R139.1@641.73,1531.5 ; Q6.2@1322.83,3019.69 R61.1@1368.11,3019.68 v2(1368.11,3125.98) ; 5084.65,3015.75 5135.83,2964.57 R169.2@5135.83,2734.25 5155.51,2714.57 5155.51,1564.96 5291.34,1429.13 v2(5446.85,1429.13) ; v2(5151.57,722.44) 5232.28,641.73 5389.76,641.73 5401.57,653.54 C109.1@5405.51,655.51 ; v2(5246.06,1053.15) 5246.06,1096.46 5257.87,1108.27 R207.1@5285.43,1108.27 ; C111.1@5405.51,913.39 C29.1@5405.51,959.77 ; v2(5425.2,1222.44) 5433.07,1222.44 5450.79,1240.16 R9212.2@5450.79,1265.75 ; C29.1@5402.69,960.63 C29.1@5405.51,960.63 ; C29.1@5402.69,960.63 C29.1@5405.51,959.77 ; C29.1@5402.69,960.63 v2(5372.05,960.63) C29.1@5405.51,960.63 ; C29.1@5405.51,959.77 C29.1@5405.51,960.63
  Top w39.37: v1(61.02,1009.84) v2(226.38,1009.84) 255.91,1009.84 v2(393.7,1147.64) v2(622.05,1147.64) v2(893.7,1147.64) v2(921.26,1147.64) v2(948.82,1147.64) v2@927.17,1147.64
  Top w59.06: v1@84.65,1795.28 151.57,1795.28 192.91,1836.61 CON1.1@192.91,1876.38
  Bottom w3.94: v1(1094.49,1543.31) 1106.3,1555.12 1108.27,1557.09 1108.27,1561.02 1106.3,1562.99 ; v1(1094.49,1612.2) 1106.3,1600.39
  Bottom w11.81: 5253.94,722.44 v1(5253.94,777.56)
  Bottom w15.75: v1(523.62,1551.18) 578.74,1551.18 598.43,1531.5 v2(622.05,1531.5) ; v1(1649.61,1425.2) 1696.85,1425.2 1767.72,1496.06 1964.57,1496.06 2015.75,1547.24 2015.75,1708.66 v1(2096.46,1789.37) ; v1(2082.68,1669.29) 2082.68,468.5 2232.28,318.9 v1(2232.28,183.07)
  Bottom w19.68: v2(226.38,427.17) v2(226.38,1009.84) ; v2(393.7,1147.64) v2(393.7,1470.47) ; v2(622.05,1147.64) v2(622.05,1531.5) ; v2(5151.57,722.44) 5253.94,722.44 5336.61,722.44 5372.05,757.87 v2(5372.05,960.63) 5372.05,962.6 5340.55,994.09 5261.81,994.09 5246.06,1009.84 v2(5246.06,1053.15) ; v1(5324.8,1222.44) v2(5425.2,1222.44) 5446.85,1244.09 v2(5446.85,1429.13)
  Bottom w31.5: 1106.3,1608.27 v1@1112.2,1608.27
  Bottom w39.37: v2(893.7,1147.64) v2(921.26,1147.64) v2(948.82,1147.64) 1031.5,1147.64 1106.3,1222.44 1106.3,1555.12 1106.3,1562.99 ; 1106.3,1562.99 1106.3,1600.39 1106.3,1608.27 1106.3,1562.99
  Bottom w43.31: CON1.17@992.91,1876.38 992.91,1832.68 1106.3,1719.29 1106.3,1608.27
  other v1: 41.34,964.57 61.02,964.57 41.34,986.22 61.02,986.22 41.34,1009.84 1094.49,1472.44 1116.14,1472.44 1116.14,1543.31 1116.14,1612.2 1094.49,1685.04 1116.14,1685.04 84.65,1777.56 106.3,1777.56 106.3,1797.24 84.65,1816.93 106.3,1816.93 958.66,2799.21 982.28,2799.21 2059.06,2811.02 2082.68,2811.02 958.66,2820.87 982.28,2820.87 2059.06,2832.68 2082.68,2832.68 5106.3,3001.97 5106.3,3025.59
  other v2: 336.61,2600.39 362.2,2600.39 385.83,2600.39
VCC3V3_TP: C48.1 J12.2 Q4.3 R44.2 | length 332.6
  Top w9.84: v1(500,3122.05) J12.2@500,3169.29
  Top w15.75: C48.1@393.7,3062.99 v1(393.7,3080.71)
  Top w19.68: Q4.3@265.75,3102.36 305.12,3062.99 R44.2@356.3,3062.99 C48.1@393.7,3062.99
  Bottom w15.75: v1(393.7,3080.71) 458.66,3080.71 v1(500,3122.05)
VCC5V0_USB: C91.1 C95.1 C99.1 C130.1 C131.1 CON1.2 CON1.4 FB1.1 FB5.1 Q10.2 R64.1 R113.1 R118.1 R148.1 R162.2 R163.2 R198.1 R223.1 U18.5 U19.5 U20.5 U28.4 | length 9826.9
  Top w3.94: v1(600.39,2155.51) 600.39,2169.29 v1(600.39,2177.17) 608.27,2169.29 610.24,2167.32 612.2,2169.29 620.08,2177.17 v1(624.02,2177.17) 624.02,2169.29 v1(624.02,2155.51) ; v1(838.58,2155.51) 848.76,2165.69 ; v1(838.58,2177.17) 838.58,2175.87 845.16,2169.29 848.76,2165.69 ; 850.39,2169.29 850.39,2167.32 848.76,2165.69 ; 860.24,2169.29 862.2,2167.32 ; v1(862.2,2155.51) 862.2,2167.32 ; v1(862.2,2177.17) 862.2,2169.29 862.2,2167.32 ; v1(1019.69,2157.48) v1@1041.34,2179.13 ; 1031.5,2169.29 v1@1041.34,2179.13 ; v1(1133.86,2177.17) 1043.31,2177.17 v1(1043.31,2179.13) v1@1041.34,2179.13
  Top w15.75: v1(2476.38,2797.24) R223.1@2476.38,2818.9 ; R118.1@3899.61,-23.62 v1(3917.32,-23.62)
  Top w19.68: Q10.2@1256.28,2665.26 1256.37,2665.35 1283.46,2665.35 1293.31,2675.2 1293.31,2738.19 1309.06,2753.94 1328.74,2753.94 1340.55,2765.75 R163.2@1340.55,2783.46
  Top w59.06: CON1.2@192.91,1976.38 CON1.4@292.91,1976.38 485.83,2169.29 ; 1017.72,2169.29 1031.5,2169.29 ; 485.83,2169.29 600.39,2169.29 608.27,2169.29 ; 485.83,2169.29 608.27,2169.29 ; 608.27,2169.29 612.2,2169.29 ; 612.2,2169.29 624.02,2169.29 ; 612.2,2169.29 1031.5,2169.29 ; 624.02,2169.29 845.16,2169.29 850.39,2169.29 860.24,2169.29 862.2,2169.29 1031.5,2169.29 ; 624.02,2169.29 1031.5,2169.29
  Power w3.94: v1(1738.19,2753.94) 1748.03,2763.78 1748.03,2765.75 ; v1(2114.17,2832.68) 2125.98,2820.87
  Power w39.37: 1748.03,2765.75 1748.03,2789.37 1765.75,2807.09 1923.23,2807.09 1988.19,2742.13 2064.96,2742.13 2125.98,2803.15 2125.98,2820.87
  Bottom w3.94: v1(600.39,2155.51) 612.2,2167.32 ; 612.2,2167.19 623.89,2155.51 v1(624.02,2155.51) ; 663.39,3125.98 v1(675.2,3137.8) ; v1(1019.69,2157.48) 1030.81,2168.6 ; v1(1019.69,2179.13) 1020.27,2179.13 1030.81,2168.6 ; v1(1021.65,2820.87) 1031.5,2811.02 ; 1030.5,2168.3 1031.37,2168.3 ; 1031.5,2171.26 1031.5,2169.29 1030.81,2168.6 ; v1(1043.31,2157.48) 1042.19,2157.48 1031.37,2168.3 ; v1(1043.31,2179.13) 1032.47,2168.3 1031.37,2168.3 ; v1(1133.86,2155.51) 1145.67,2167.32 1143.7,2167.32 ; v1(1375.98,2633.86) 1375.98,2643.7 ; 1748.03,2763.78 v1(1757.87,2753.94) ; 5812.99,2637.8 v1(5812.99,2671.26)
  Bottom w15.75: v1(2135.83,2811.02) 2149.61,2797.24 v1(2476.38,2797.24)
  Bottom w39.37: 612.2,2165.35 612.2,2167.19 612.2,3074.8 v1(653.54,3116.14) 663.39,3125.98 ; 1031.5,2171.26 1031.5,2811.02 ; 1143.7,2167.32 1143.7,2513.78 1273.62,2643.7 1375.98,2643.7 1505.91,2643.7 1625.98,2763.78 1748.03,2763.78
  Bottom w59.06: U28.4@5240.55,-5.51 5313.78,-78.74 5960.63,-78.74 6078.74,39.37 6078.74,2517.72 6027.56,2568.9 5881.89,2568.9 5812.99,2637.8
  other v1: 1157.48,210.63 1181.1,210.63 1202.76,210.63 1157.48,232.28 1181.1,232.28 1157.48,253.94 1181.1,253.94 3862.2,261.81 3881.89,261.81 3901.57,261.81 3862.2,281.5 3881.89,281.5 3901.57,281.5 3862.2,301.18 3881.89,301.18 3901.57,301.18 3202.76,511.81 3222.44,511.81 3202.76,531.5 3222.44,531.5 3202.76,551.18 3222.44,551.18 3202.76,572.83 3222.44,572.83 3244.09,572.83 1155.51,2155.51 1155.51,2177.17 5838.58,2608.27 5858.27,2608.27 5838.58,2631.89 5858.27,2631.89 1354.33,2633.86 5838.58,2651.57 5858.27,2651.57 1354.33,2655.51 1375.98,2655.51 5791.34,2671.26 5838.58,2671.26 1738.19,2775.59 1757.87,2775.59 1021.65,2799.21 1043.31,2799.21 2114.17,2811.02 1043.31,2820.87 2135.83,2832.68 675.2,3116.14 653.54,3137.8
VCC5V0_USB1: C92.1 C93.1 C94.1 J17.1 J17.5 U18.1
VCC5V0_USB2: C96.1 C97.1 C98.1 J18.1 J18.2 U19.1 | length 551.2
  Top w3.94: v1(3978.35,303.15) 3978.35,320.86 U19.1@3992.13,320.87
  Top w59.06: J18.1@4113.39,555.12 J18.2@4213.39,555.12
  Bottom w3.94: 4015.75,328.74 v1(4021.65,322.83)
  Bottom w39.37: 4015.75,328.74 4015.75,533.46 4037.4,555.12 J18.1@4113.39,555.12 J18.2@4213.39,555.12
  other v1: 3996.06,303.15 4015.75,303.15 3962.6,318.9 4041.34,322.83
VCC5V_P: C59.1 C85.1 C157.1 C158.1 C169.1 L4.1 Q10.3 R70.1 R162.1 R205.1 U11.1 U35.1 | length 6312.7
  Top w15.75: v1(3793.31,1370.08) 3793.31,1472.44 3580.71,1685.04 3580.71,2303.15 3826.77,2549.21 v1(3826.77,2820.87) ; L4.1@5104.33,836.61 v1(5124.02,836.61) ; v1(5118.11,1196.85) 5224.41,1090.55 v1(5224.41,1072.83)
  Top w19.68: R205.1@2072.83,2663.39 2072.83,2690.58 C169.1@2106.66,2724.41 ; C85.1@5104.33,801.18 L4.1@5104.33,836.61
  Bottom w3.94: v1(1375.98,2714.57) 1385.83,2704.72 ; 2129.92,2744.09 v1(2129.92,2755.91) ; 2149.93,2744.09 2151.57,2745.73 v1(2151.57,2755.91) ; 2190.94,2744.09 v1(2190.94,2755.91)
  Bottom w15.75: v1(2190.94,2755.91) 2566.93,2755.91 2645.67,2677.17 3220.96,2677.17 3364.66,2820.87 v1(3826.77,2820.87) ; v1(3793.31,1370.08) 4143.7,1370.08 4285.43,1228.35 5021.65,1228.35 5047.24,1202.76 5112.2,1202.76 v1(5118.11,1196.85) ; v1(5124.02,836.61) 5202.76,836.61 5224.41,858.27 v1(5224.41,1072.83)
  Bottom w39.37: 1385.83,2704.72 1501.97,2704.72 1606.3,2809.06 1919.29,2809.06 1984.25,2744.09 2129.92,2744.09 2149.93,2744.09 2190.94,2744.09
  other v1: 1375.98,2692.91 1429.13,2692.91 1429.13,2714.57 2171.26,2755.91
VCC12V: C10.1 C11.1 C27.1 C28.1 C38.1 C132.1 C133.1 C134.1 J6.A2 J6.A3 J6.B1 J6.B2 J6.B3 Q2.2 R14.1 R36.1 R37.1 R149.2 R150.1 U7.5 U27.1 U28.1 | length 3777.6
  Top w15.75: v1(5297.24,2305.12) R149.2@5312.99,2305.12 ; v1(5370.08,1507.87) R14.1@5370.08,1521.65 ; C11.1@5500,1553.15 v1(5521.65,1553.15)
  Top w51.18: J6.A2@5733.46,1707.09 5772.44,1746.06 ; J6.B1@5910.63,1667.72 J6.B3@5910.63,1746.06 ; J6.B3@5910.63,1746.46 J6.B3@5910.63,1746.06 ; J6.B2@5989.37,1707.09 5950.39,1746.06 ; 5772.44,1746.06 5950.39,1746.06 ; 5772.44,1746.06 J6.B3@5910.63,1746.06 ; J6.B3@5910.63,1746.06 5950.39,1746.06
  Bottom w15.75: v1(5297.24,2305.12) 5381.89,2305.12 v1(5419.29,2267.72) ; v1(5370.08,1507.87) 5370.08,1535.43 5387.8,1553.15 v1(5521.65,1553.15)
  Bottom w51.18: J6.A2@5733.46,1707.09 5772.83,1746.46 J6.A3@5812.2,1746.46 J6.B3@5910.63,1746.46 ; J6.B1@5910.63,1667.72 J6.B3@5910.63,1746.46 ; J6.B2@5989.37,1707.09 J6.B3@5910.63,1746.46
  Bottom w59.06: U28.1@5240.55,294.49 5332.68,202.36 5332.68,74.8 5401.57,5.91 5861.42,5.91 5910.63,55.12 J6.B1@5910.63,1667.72
  other v1: 5730.31,1547.24 5755.91,1547.24 5730.31,1568.9 5755.91,1568.9 5730.31,1592.52 5755.91,1592.52 5730.31,1614.17 5755.91,1614.17 5730.31,1637.8 5755.91,1637.8 5730.31,1661.42 5755.91,1661.42 5399.61,2202.76 5419.29,2202.76 5438.98,2202.76 5507.87,2202.76 5576.77,2202.76 5399.61,2224.41 5419.29,2224.41 5438.98,2224.41 5507.87,2224.41 5576.77,2224.41 5476.38,2242.13 5419.29,2246.06 5438.98,2246.06 5438.98,2267.72
  other v2: 253.94,2074.8 281.5,2074.8 253.94,2100.39 281.5,2100.39 281.5,2125.98
VCC12V_DCIN: C24.1 C140.1 C142.1 C151.2 C152.1 D45.2 D46.2 D47.2 P5.1 R150.2 R151.2 TP9.1 | length 37.4
  Top w19.68: R151.2@5312.99,2572.83 C152.1@5312.99,2610.24
  other v1: 5250,2838.58 5269.69,2838.58 5291.34,2838.58 5311.02,2838.58 5250,2860.24 5269.69,2860.24 5291.34,2860.24 5311.02,2860.24 5250,2881.89 5269.69,2881.89 5291.34,2881.89 5311.02,2881.89 5250,2901.57 5269.69,2901.57 5291.34,2901.57 5311.02,2901.57 5250,2921.26 5269.69,2921.26 5291.34,2921.26 5311.02,2921.26 5553.15,3037.4 5572.83,3037.4 5592.52,3037.4 5612.2,3037.4 5631.89,3037.4 5651.57,3037.4 5673.23,3037.4 5692.91,3037.4 5631.89,3059.06 5651.57,3059.06 5673.23,3059.06 5692.91,3059.06 5631.89,3078.74 5651.57,3078.74 5673.23,3078.74 5692.91,3078.74 5631.89,3098.43 5651.57,3098.43 5673.23,3098.43 5631.89,3118.11 5651.57,3118.11
VCC12V_LCD: C37.1 C39.1 J11.36 J11.37 J11.38 J11.39 Q2.3 R36.2
VCC_1V8_1: C60.1 C61.1 C62.1 LCD1.29 U11.5 | length 613.9
  Top w9.84: v1(1196.85,3267.72) LCD1.29@1196.85,3332.68
  Top w19.68: C62.1@1322.83,3267.72 1293.31,3267.72 v2(1275.59,3250) 1275.59,2990.16 1285.43,2980.31 1320.87,2980.31 1336.61,2964.57 C61.1@1336.61,2942.91
  Top w27.56: C60.1@1336.61,2887.8 C61.1@1336.61,2942.91
  Bottom w19.68: v1(1196.85,3267.72) 1214.57,3250 v2(1275.59,3250)
VCC_1V8_2: C170.1 C171.1 C172.1 R9210.1 U35.5 | length 934.7
  Top w19.68: R9210.1@2179.13,3330.71 2179.13,3346.46 2192.91,3360.24 2309.06,3360.24 2352.36,3316.93 2352.36,2958.66 2407.48,2903.54 2407.48,2814.96 2399.61,2807.09 C172.1@2379.92,2807.09 C171.1@2334.65,2807.09
  Top w27.56: U35.5@2269.68,2738.19 2293.31,2738.19 2314.96,2759.84 C170.1@2334.65,2759.84 C171.1@2334.65,2807.09
VCC_3_3V: L3.2 R91.1 R94.1 R96.1 R105.1 R106.1 | length 716.9
  Top w15.75: R106.1@4840.55,769.68 v1(4858.27,769.68) R94.1@4877.95,769.68 ; R105.1@4990.16,769.68 v1(5007.87,769.68) ; R96.1@5029.53,1062.99 R91.1@5029.53,978.35 v1(5051.18,978.35) 5112.2,978.35 5135.83,954.72 5135.83,919.29 5124.02,907.48 L3.2@5106.3,907.48
  Bottom w15.75: v1(4858.27,769.68) v1(5007.87,769.68) 5033.46,769.68 5051.18,787.4 v1(5051.18,978.35)
VCC_LCD_MIPI: C56.1 C57.1 C58.1 LCD1.30 LCD1.31 Q7.3 | length 222.4
  Top w9.84: LCD1.30@1208.66,3219.5 1208.66,3244.09 1220.47,3255.91 LCD1.31@1220.47,3332.68
  Top w19.68: C56.1@1161.42,3116.14 C57.1@1208.66,3116.14
  Top w27.56: C58.1@1161.42,3059.06 C56.1@1161.42,3116.14
VCC_LCD_MIPI_2: C166.1 C167.1 C168.1 Q13.3 R9211.1 U90074.1 U90074.30 U90074.31 | length 632.6
  Top w9.84: v1(1712.6,3281.5) 1712.6,3269.68 1724.41,3257.87 U90074.30@1724.41,3223.43 ; v1(1712.6,3301.18) U90074.31@1712.6,3336.61 ; v1(2066.93,3299.21) U90074.1@2066.93,3336.61
  Top w15.75: v1(1712.6,3281.5) v1(1712.6,3301.18) ; 2194.88,3263.78 2198.82,3267.72 C168.1@2218.5,3267.72
  Bottom w3.94: 2070.87,3289.37 2076.77,3289.37 v1(2088.58,3277.56)
  Bottom w27.56: v1(1712.6,3281.5) 1712.6,3318.9 1724.41,3330.71 2049.21,3330.71 2070.87,3309.06 2070.87,3289.37
  other v1: 2066.93,3277.56
VCC_LDO5V: P4.1 R155.1 | length 75.3
  Top w15.75: v1(5590.55,2295.28) 5604.33,2295.28 5610.24,2301.18 R155.1@5610.24,2332.68
  Bottom w15.75: P4.1@5568.9,2295.28 v1(5590.55,2295.28)
VCC_LEDA1: C51.1 D13.2 LCD1.1 LCD1.2 LCD1.3 U10.8 | length 540.5
  Top w11.81: v1(647.64,2769.68) U10.8@685.04,2769.68
  Top w15.75: v1(702.76,3198.82) D13.2@753.94,3198.82
  Bottom w11.81: v1(647.64,2769.68) 647.64,3049.21 702.76,3104.33 v1(702.76,3198.82)
VCC_LEDA2: C161.1 D50.2 U34.8 U90074.38 U90074.39 | length 700.9
  Top w9.84: U90074.39@1618.11,3336.61 1618.11,3281.5 1629.92,3269.68 U90074.38@1629.92,3223.43
  Top w11.81: D50.2@1769.69,3114.17 1730.31,3114.17 1730.31,3000 1679.13,2948.82 1679.13,2742.13 1694.88,2726.38 U34.8@1822.83,2726.38
VCC_LEDK1: LCD1.5 LCD1.6 LCD1.7 LCD1.8 R53.2 R55.1 R56.1 | length 314.2
  Top w11.81: R53.2@883.86,2789.37 883.86,2811.02 868.11,2826.77 868.11,3041.34 883.86,3057.09 R55.1@917.32,3057.09
VCC_LEDK2: R188.2 R189.1 R192.1 U90074.34 U90074.35 | length 876.8
  Top w9.84: v1(1665.35,3299.21) U90074.35@1665.35,3336.61 ; U90074.34@1677.17,3223.43 v1(1677.17,3257.87)
  Top w11.81: U90074.34@1677.17,3223.43 1677.17,3192.91 1700.79,3169.29 1986.22,3169.29 2009.84,3145.67 R188.2@2009.84,2769.68
  Top w15.75: v1(1665.35,3299.21) 1677.17,3287.4 v1(1677.17,3281.5) v1(1677.17,3257.87)
  other v1: 1472.44,3246.06 1472.44,3269.68 1470.47,3303.15 1470.47,3326.77
VCC_RTC: C125.1 D42.2 D43.3 U24.8 | length 317.5
  Top w15.75: D42.2@460.63,1480.31 488.19,1480.31 513.78,1505.91 549.21,1505.91 555.12,1511.81 C125.1@555.12,1529.53 570.87,1529.53 624.13,1582.79 U24.8@653.53,1582.79
  Top w19.68: D43.3@431.1,1529.52 431.1,1492.13 442.91,1480.31 D42.2@460.63,1480.31
VCC_TP: C52.1 C54.1 Q6.3 R61.2 U90074.24 | length 660.2
  Top w9.84: U90074.24@1795.28,3223.43 v1(1795.28,3257.87)
  Top w15.75: C54.1@1494.09,3057.09 v1(1494.09,3122.05)
  Top w19.68: R61.2@1399.61,3019.68 1399.61,3047.24 Q6.3@1409.45,3057.09 C54.1@1492.13,3057.09 ; C54.1@1494.09,3057.09 C54.1@1492.13,3057.09 ; C52.1@1539.37,3057.09 C54.1@1492.13,3057.09
  Bottom w15.75: v1(1494.09,3122.05) 1710.63,3122.05 1795.28,3206.69 v1(1795.28,3257.87)
VD33: C83.2 L3.1 U17.20 | length 230.9
  Top w9.84: U17.20@4917.32,933.07 4958.66,933.07 4976.38,915.35 C83.2@5001.97,915.35
  Top w19.68: C83.2@5001.97,915.35 5001.97,940.94 5011.81,950.79 5094.49,950.79 L3.1@5106.3,938.98
WL_NDIS: U31.1 U33.89 | length 1623
  Top w3.94: U33.89@4520.47,2727.76 4562.99,2727.76 4580.71,2745.47 v1(4580.71,2767.72)
  Bottom w3.94: v1(4580.71,2767.72) 4738.86,2767.72 4768.39,2738.19 5822.83,2738.19 5868.11,2783.46 6008.27,2783.46 U31.1@6061.02,2836.22
XRSTJ: R106.2 U17.16 | length 74.8
  Top w7.87: R106.2@4840.55,801.18 U17.16@4840.55,875.98
pads on no net: BAT1.4 BAT1.5 CN14A1.14 CN14A1.15 H100.1 H101.1 H102.1 H103.1 H104.1 H105.1 H106.1 H107.1 J1.14 J3.21 J3.22 J6.A7 J6.B5 J6.B6 J6.B17 J6.C1 J6.C2 J8.1 J8.7 J8.8 J11.1 J11.22 J11.27 J11.34 J11.35 J11.40 J11.41 J11.42 J16.10 J16.11 J16.12 J16.13 J18.9 J18.10 J24.16 J24.26 J24.28 J24.40 J24.91 J24.92 LCD1.4 LCD1.26 LCD1.32 LCD1.33 M1.1 M2.1 M3.1 M4.1 M5.1 U10.1 U10.3 U10.6 U10.10 U17.2 U17.22 U17.23 U17.24 U23.3 U23.4 U27.4 U27.12 U33.64 U33.68 U33.70 U33.72 U33.73 U33.104 U33.106 U33.133 U33.135 U33.139 U33.141 U33.143 U33.145 U33.146 U33.147 U33.148 U33.149 U33.152 U33.154 U33.158 U33.160 U33.164 U33.166 U34.1 U34.3 U34.6 U34.10 U37.6 U90074.3 U90074.5 U90074.36 U90074.37 Y2.3

## Polygon pours and split planes (outlines as drawn)
GND on Power (solid, remove dead copper, pour order 7): -163.39,1177.17 -163.39,1139.76 -110.24,1139.76 -110.24,1177.17
VCC3V3_SYS on Power (solid, remove dead copper, pour order 5): -104.33,944.88 124.02,944.88 124.02,2586.61 3190.94,2586.61 3190.94,2732.28 5125.98,2732.28 5125.98,3374.02 1.97,3374.02 -104.33,3267.72
+5V_INPUT on Power (solid, remove dead copper, pour order 3): 2730.31,1651.57 1401.57,1651.57 1401.57,2580.71 3196.85,2580.71 3196.85,2724.41 4641.73,2724.41 4641.73,1791.34 2730.31,1791.34
GND on Power (solid, remove dead copper, pour order 2): -110.24,937.01 -110.24,1153.54 -163.39,1153.54 -163.39,-165.35 6188.98,-165.35 6188.98,3431.1 -163.39,3431.1 -163.39,1163.39 -110.24,1163.39 -110.24,3267.72 1.97,3379.92 5131.89,3379.92 5131.89,2724.41 4647.64,2724.41 4647.64,1791.34 5187.01,1791.34 5187.01,2338.58 5773.62,2338.58 5773.62,2688.98 6133.86,2688.98 6133.86,-3.94 6039.37,-98.43 124.02,-98.43 124.02,937.01
VCC5V0_USB on Power (solid, remove dead copper, pour order 1): 6127.95,0 6127.95,2683.07 5779.53,2683.07 5779.53,935.04 4970.47,935.04 4970.47,712.6 3596.46,712.6 3374.02,935.04 877.95,935.04 877.95,2192.91 305.12,2192.91 305.12,2055.12 129.92,2055.12 129.92,-92.52 6035.43,-92.52
VCC12V on Power (solid, remove dead copper, pour order 0): 5192.91,2332.68 5192.91,1783.46 2736.22,1783.46 2736.22,1643.7 1395.67,1643.7 1395.67,2580.71 129.92,2580.71 129.92,2061.02 299.21,2061.02 299.21,2198.82 883.86,2198.82 883.86,940.94 3377.95,940.94 3598.43,720.47 4962.6,720.47 4962.6,940.94 5773.62,940.94 5773.62,2332.68
GND on Top (solid, remove dead copper, pour order 4): -147.64,3415.35 -147.64,-149.61 6173.23,-149.61 6173.23,3415.35
GND on Bottom (solid, remove dead copper, pour order 6): -171.26,3438.98 -171.26,-173.23 6196.85,-173.23 6196.85,3438.98
GND on GND (split plane): 6050.96,3403.15 6068.4,3398.48 6085.09,3391.57 6100.73,3382.53 6115.07,3371.54 6127.84,3358.77 6138.83,3344.44 6147.87,3328.79 6154.78,3312.1 6159.45,3294.66 6161.81,3276.75 6161.81,3267.72 6161.81,-0.79 6161.81,-9.82 6159.45,-27.73 6154.78,-45.18 6147.87,-61.86 6138.83,-77.51 6127.84,-91.84 6115.07,-104.61 6100.73,-115.61 6085.09,-124.64 6068.4,-131.55 6050.96,-136.23 6033.05,-138.58 -9.03,-138.58 -26.94,-136.23 -44.39,-131.55 -61.08,-124.64 -76.72,-115.61 -91.05,-104.61 -103.82,-91.84 -114.82,-77.51 -123.85,-61.86 -130.76,-45.18 -135.44,-27.73 -137.8,-9.82 -137.8,-0.79 -137.8,3267.72 -137.8,3276.75 -135.44,3294.66 -130.76,3312.1 -123.85,3328.79 -114.82,3344.44 -103.82,3358.77 -91.05,3371.54 -76.72,3382.53 -61.08,3391.57 -44.39,3398.48 -26.94,3403.15 -9.03,3405.51 6033.05,3405.51